# Altium PCB deepshark_pcb.PcbDoc (part 1 of 2)
Units mm, origin at the board's own origin, x right, y up, seen from the top; angles counter-clockwise.
Board outline 200 x 80 mm, 2 copper layers (Top Layer, Bottom Layer); 211 components, 120 nets, 671 pads, 118 vias.
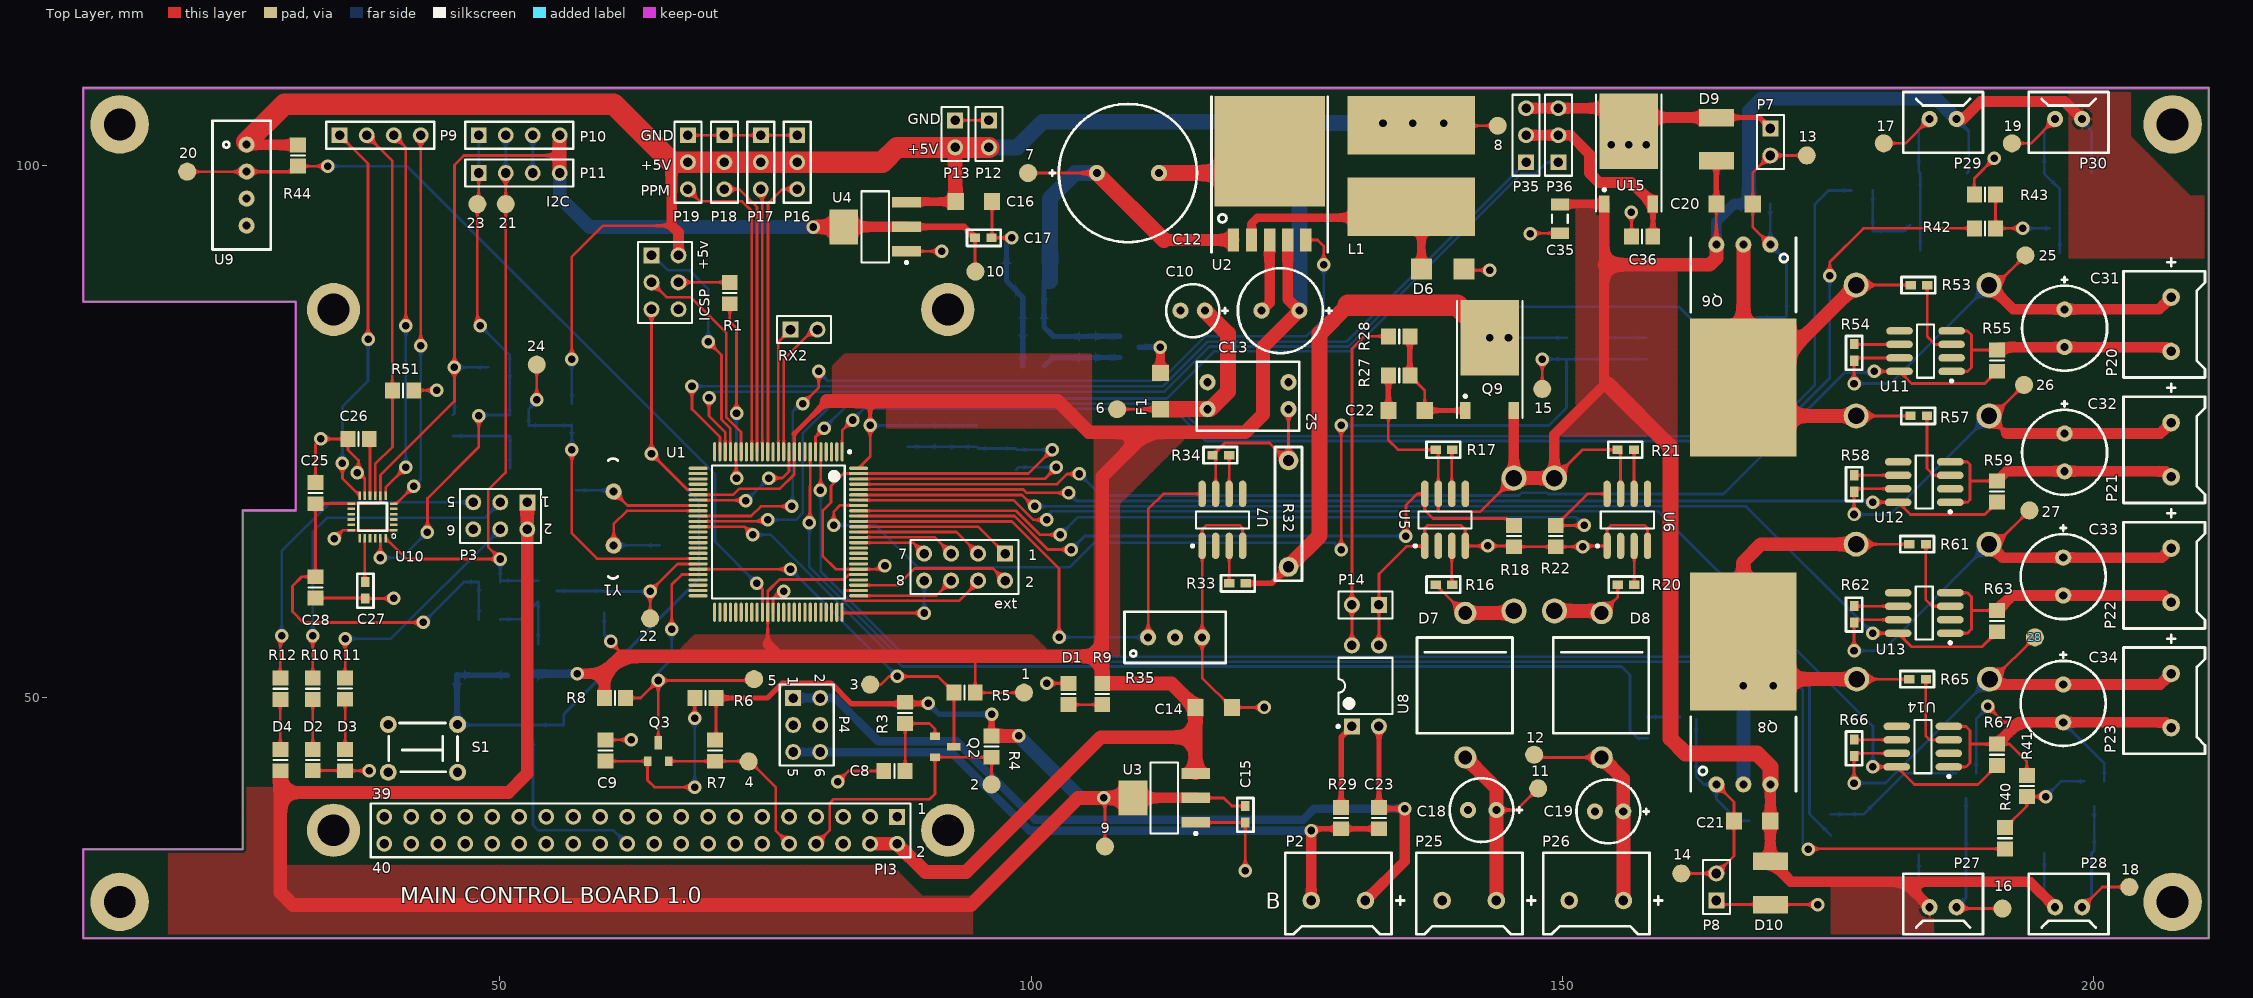
[diagram p0: Top Layer view]
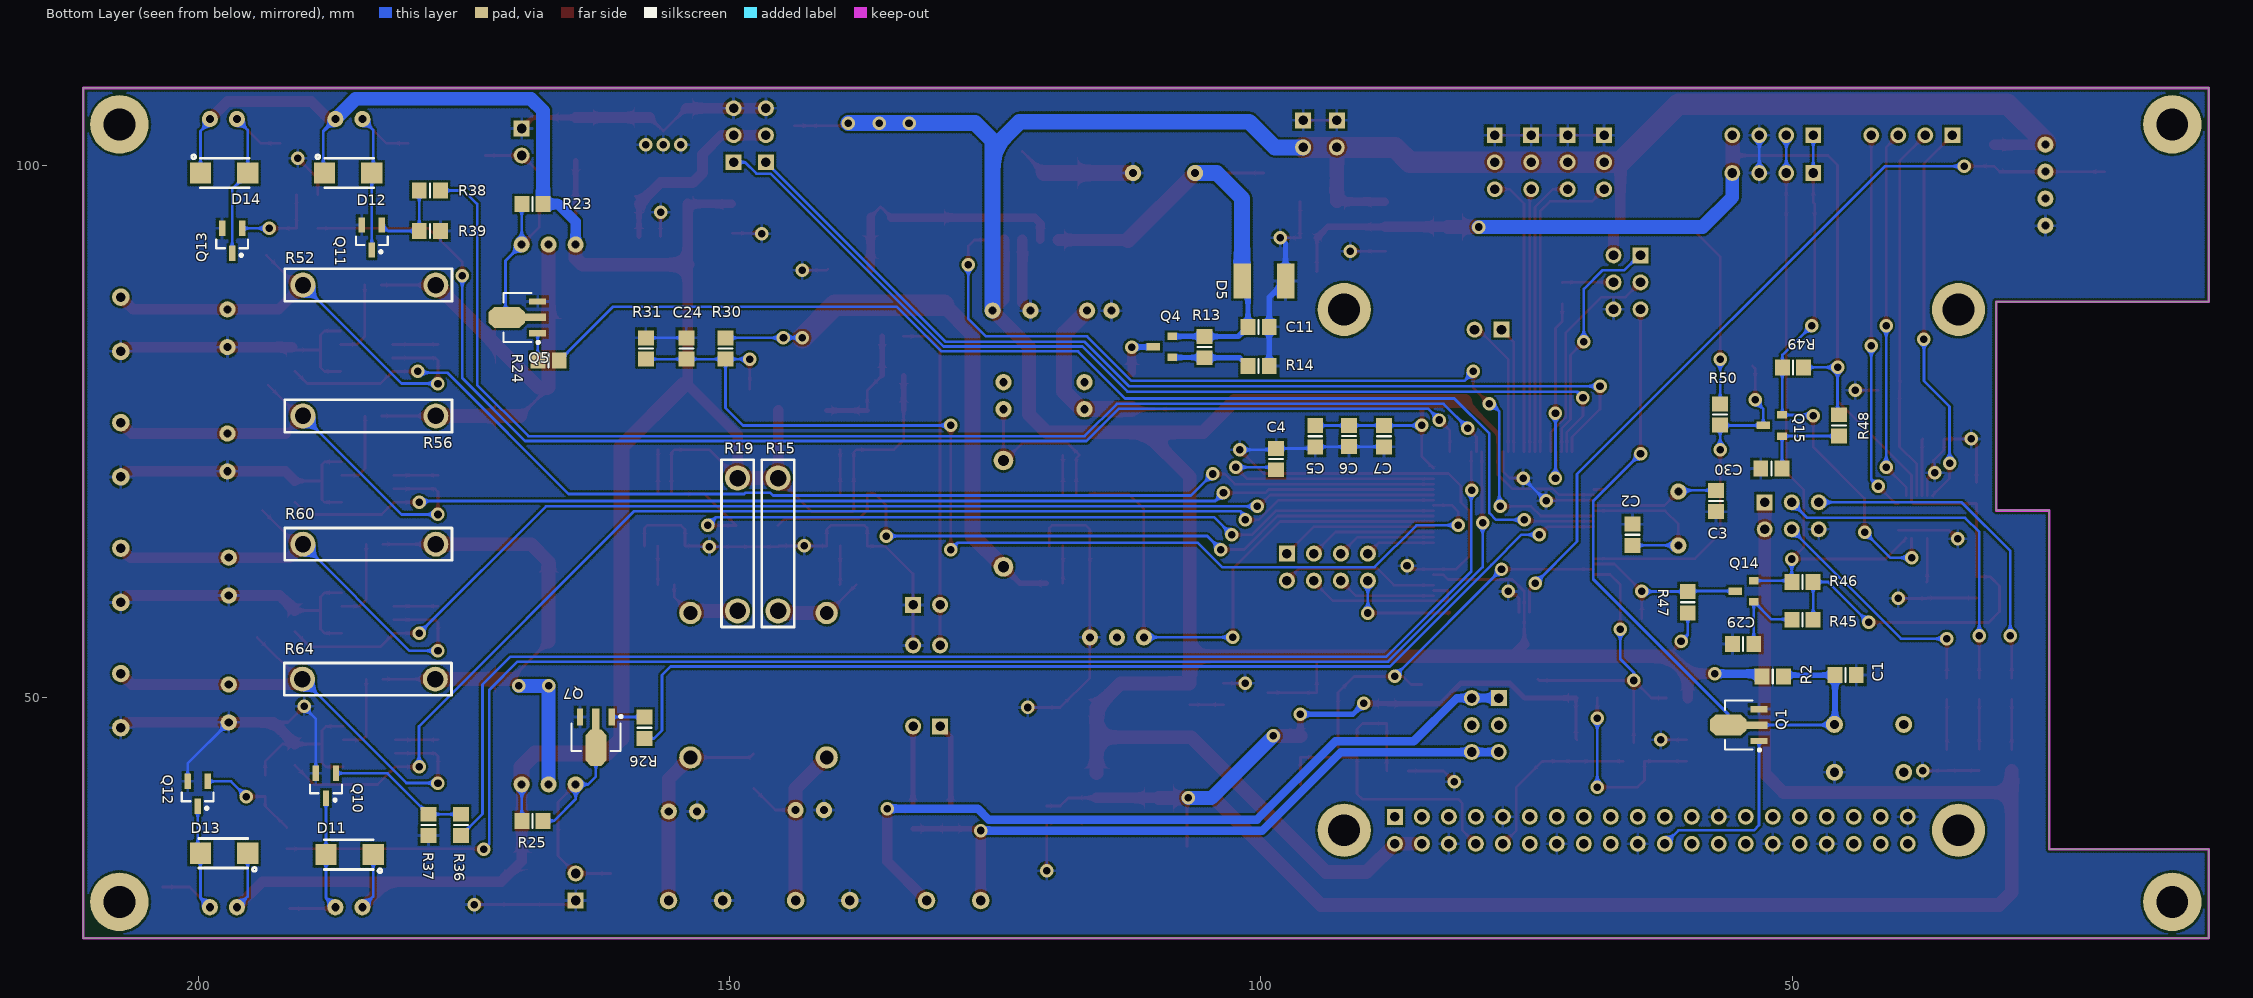
[diagram p1: Bottom Layer view, seen from below]

## Layer stack, top to bottom
Top Solder: solder mask 0.0102, Solder Resist, Dk 3.5
Top Layer: signal copper 0.0356
Dielectric 1: dielectric 0.32, FR-4, Dk 4.8
Bottom Layer: signal copper 0.0356
Bottom Solder: solder mask 0.0102, Solder Resist, Dk 3.5

## Board outline
10.795,27.315 10.795,35.687 25.795,35.687 25.795,67.56 30.795,67.56 30.795,87.195 10.795,87.195 10.795,107.315 210.795,107.315 210.795,27.315

## Design rules (kind name [scope] priority, off if disabled: settings)
Clearance [All] p1: gap=0.2
PolygonConnect [All] p1: connectstyle=Relief reliefconductorwidth=0.254 reliefentries=4 polygonreliefangle="90 Angle" airgapwidth=0.254
RoutingVias [All] p1: holewidth=0.711 width=1.27 viastyle="Through Hole" minholewidth=0.711 minwidth=1.27 maxholewidth=0.711 maxwidth=1.27
SolderMaskExpansion [All] p1: expansion=0.102
Width [All] p1: maxlimit=5 minlimit=0.254 preferedwidth=0.254
30 further rules are at their usual default settings.

## Classes and differential pairs
component class deepshark_servo: C35 C36 P35 P36 U15
component class deepshark_sensor: 20 21 22 23 24 C25 C26 C27 C28 C29 C30 Q14 Q15 R44 R45 R46 R47 R48 R49 R50 R51 U9 U10
component class deepshark_sch: 1 2 3 4 5 C1 C2 C3 C4 C5 C6 C7 C8 C9 D1 ICSP Q1 Q2 Q3 R1 R2 R3 R4 R5 R6 R7 R8 R9 S1 U1 Y1
component class deepshark_pwm_power: 16 17 18 19 D11 D12 D13 D14 Q10 Q11 Q12 Q13 R36 R37 R38 R39 R40 R41 R42 R43
component class deepshark_power_switch: 11 12 13 14 15 C18 C19 C20 C21 C22 C23 C24 D7 D8 D9 D10 Q5 Q6 Q7 Q8 Q9 R15 R16 R17 R18 R19 R20 R21 R22 R23 R24 R25 R26 R27 R28 R29 R30 R31 R32 R33 R34 R35 U5 U6 U7 U8
component class deepshark_power_sch: 6 7 8 9 10 C10 C11 C12 C13 C14 C15 C16 C17 D5 D6 F1 L1 Q4 R13 R14 S2 U2 U3 U4
component class deepshark_ecs: 25 26 27 28 C31 C32 C33 C34 R52 R53 R54 R55 R56 R57 R58 R59 R60 R61 R62 R63 R64 R65 R66 R67 U11 U12 U13 U14
component class deepshark_connector: D2 D3 D4 ext P2 P3 P4 P7 P8 P9 P10 P11 P12 P13 P14 P16 P17 P18 P19 P20 P21 P22 P23 P25 P26 P27 P28 P29 P30 PI3 R10 R11 R12 RX2

## Components (designator, comment, footprint, x,y, rotation, side; value= is the part's Value field where it differs from the comment)
1 "TP1" TestPoint#1 99.314,50.419 r0 top
2 "TP" TestPoint#1 96.266,41.783 r0 top
3 "TP" TestPoint#1 84.836,51.181 r0 top
4 "TP" TestPoint#1 73.406,43.942 r0 top
5 "TP" TestPoint#1 73.914,51.689 r0 top
6 "TP" TestPoint#1 108.077,77.089 r0 top
7 "TP" TestPoint#1 99.695,99.314 r0 top
8 "TP" TestPoint#1 143.891,103.759 r0 top
9 "TP" TestPoint#1 106.934,35.941 r0 top
10 "TP" TestPoint#1 94.742,90.043 r90 top
11 "TP" TestPoint#1 147.701,41.402 r0 top
12 "TP" TestPoint#1 147.32,44.577 r90 top
13 "TP" TestPoint#1 172.974,100.965 r90 top
14 "TP" TestPoint#1 161.163,33.401 r90 top
15 "TP" TestPoint#1 148.082,78.994 r90 top
16 "TP" TestPoint#1 191.389,30.099 r90 top
17 "TP" TestPoint#1 180.213,102.108 r90 top
18 "TP" TestPoint#1 203.327,32.131 r90 top
19 "TP" TestPoint#1 192.278,102.108 r90 top
20 "TP" TestPoint#1 20.574,99.441 r90 top
21 "TP" TestPoint#1 50.546,96.393 r90 top
22 "TP" TestPoint#1 64.135,57.404 r90 top
23 "TP" TestPoint#1 47.879,96.393 r90 top
24 "TP" TestPoint#1 53.467,81.28 r90 top
25 "TP" TestPoint#1 193.548,91.567 r90 top
26 "TP" TestPoint#1 193.421,79.375 r90 top
27 "TP" TestPoint#1 193.929,67.564 r90 top
28 "TP" TestPoint#2 194.437,65.626 r90 top
C1 "Cap" 6-0805_M 44.958,52.07 r0 bottom
C2 "Cap" 6-0805_M 65.024,65.278 r90 bottom
C3 "Cap" 6-0805_M 57.15,68.453 r270 bottom
C4 "Cap" 6-0805_M 98.552,72.39 r270 bottom
C5 "Cap" 6-0805_M 94.869,74.549 r90 bottom
C6 "Cap" 6-0805_M 91.694,74.565 r90 bottom
C7 "Cap" 6-0805_M 88.392,74.549 r90 bottom
C8 "Cap" 6-0805_M 87.122,43.053 r180 top
C9 "Cap" 6-0805_M 59.944,44.974 r90 top
C10 "Cap Pol2" 22uf-25V 115.189,86.36 r180 top
C11 "Cap" 6-0805_M 100.203,84.836 r0 bottom
C12 "Cap Pol2" 680uf-50v 109.093,99.314 r0 top
C13 "Cap Pol2" 220uf-50v 123.444,86.36 r180 top
C14 "Cap Pol2" 1206 115.402,49.052 r0 top
C15 "Cap Pol2" my0603 120.142,39.751 r270 top
C16 "Cap Pol2" 1206 92.837,96.647 r0 top
C17 "Cap Pol2" my0603 94.711,93.218 r0 top
C18 "Cap Pol2" 100uf-25v 142.367,39.37 r180 top
C19 "Cap Pol2" 100uf-25v 154.305,39.243 r180 top
C20 "Cap Pol2" 1206 164.415,96.423 r0 top
C21 "Cap Pol2" 1206 169.586,38.324 r180 top
C22 "Cap" 1206 133.554,76.992 r0 top
C23 "Cap" 6-0805_M 132.715,38.608 r90 top
C24 "Cap" 6-0805_M 154.051,82.804 r270 bottom
C25 "Cap" 6-0805_M 32.639,69.199 r270 top
C26 "Cap" 6-0805_M 36.703,74.295 r0 top
C27 "Cap" my0603 37.338,60.833 r270 top
C28 "Cap" 6-0805_M 32.639,60.325 r270 top
C29 "Cap" 6-0805_M 54.61,54.991 r0 bottom
C30 "Cap" 6-0805_M 51.943,71.501 r0 bottom
C31 "Cap Pol2" 220uf-50v 197.231,84.709 r270 top
C32 "Cap Pol2" 220uf-50v 197.231,73.025 r270 top
C33 "Cap Pol2" 220uf-50v 197.104,61.341 r270 top
C34 "Cap Pol2" 220uf-50v 197.104,49.403 r270 top
C35 "Cap Semi" C1206 149.733,94.996 r90 top
C36 "Cap Semi" 6-0805_M 157.48,93.345 r0 top
D1 "POWER" 6-0805_M 103.505,50.292 r90 top
D2 "LED0" 6-0805_M 32.385,44.085 r270 top
D3 "LED0" 6-0805_M 35.433,44.069 r270 top
D4 "LED0" 6-0805_M 29.337,44.069 r90 top
D5 "SMAJ18A/20V" SMBJ6.5A 97.593,89.114 r0 bottom
D6 "1N5824" 1N5824 140.716,90.297 r180 top
D7 "10A" 10A-Rectifier 145.288,46.609 r180 top
D8 "10A" 10A-Rectifier 158.115,46.609 r180 top
D9 "SMAJ18A/20V" SMBJ6.5A 164.505,104.607 r270 top
D10 "SMAJ18A/20V" SMBJ6.5A 169.505,30.41 r90 top
D11 "M7 1N4007 1A/1000V" M7-1n4007 183.515,33.782 r0 bottom
D12 "M7 1N4007 1A/1000V" M7-1n4007 188.087,100.711 r180 bottom
D13 "M7 1N4007 1A/1000V" M7-1n4007 195.326,33.909 r0 bottom
D14 "M7 1N4007 1A/1000V" M7-1n4007 199.771,100.711 r180 bottom
ext "*" HDR2X4 97.536,63.5 r180 top locked
F1 "Fuse 3A" 1206 112.111,77.039 r90 top
ICSP "Header 3X2" HDR2X3 64.262,91.567 r270 top
L1 "Inductor" "12x12 L" 128.973,106.409 r90 top
P2 "Header 2" ConnectorBlue 126.345,30.861 r0 top
P3 "Header 3X2" HDR2X3 52.578,68.326 r180 top locked
P4 "Header 3X2" HDR2X3 77.597,49.911 r270 top locked
P7 "Header 2" HDR1X2 169.545,103.505 r270 top
P8 "Header 2" HDR1X2 164.465,30.861 r90 top
P9 "Header 4" HDR1X4 34.925,102.87 r0 top
P10 "Header 4" HDR1X4 48.006,102.87 r0 top
P11 "Header 4" HDR1X4 48.006,99.314 r0 top
P12 "Header 2" HDR1X2 96.012,104.267 r270 top
P13 "Header 2" HDR1X2 92.837,104.267 r270 top
P14 "Header 2" HDR1X2 132.715,58.674 r180 top
P16 "Header 3" HDR1X3 77.978,102.87 r270 top
P17 "Header 3" HDR1X3 74.549,102.87 r270 top
P18 "Header 3" HDR1X3 71.12,102.87 r270 top
P19 "Header 3" HDR1X3 67.691,102.87 r270 top
P20 "Header 2" ConnectorBlue 207.264,82.53 r90 top
P21 "Header 2" ConnectorBlue 207.264,70.719 r90 top
P22 "Header 2" ConnectorBlue 207.264,58.908 r90 top
P23 "Header 2" ConnectorBlue 207.264,47.117 r90 top
P25 "Header 2" ConnectorBlue 138.664,30.861 r0 top
P26 "Header 2" ConnectorBlue 150.622,30.861 r0 top
P27 "Header 2" headerX2 187.071,30.226 r180 top
P28 "Header 2" headerX2 198.882,30.226 r180 top
P29 "Header 2" headerX2 184.531,104.394 r0 top
P30 "Header 2" headerX2 196.342,104.394 r0 top
P35 "Header 3" HDR1X3 146.558,100.33 r90 top
P36 "Header 3" HDR1X3 149.606,100.33 r90 top
PI3 "Header 20X2" HDR2X20 87.376,38.735 r180 top locked
Q1 "(SS8050)NPN" SOT89M 55.007,47.371 r0 bottom
Q2 "2N7002" 2N7002 -24.903,37.397 r270 top
Q3 "2N7002" 2N7002 72.807,-71.88 r0 top
Q4 "A19T/4.2A/30V" A19T 110.106,82.953 r90 bottom
Q5 "(SS8050)NPN" SOT89M 169.942,85.725 r0 bottom
Q6 "30A/IRF9540N" my-TO-220AB 164.465,92.583 r0 top
Q7 "(SS8050)NPN" SOT89M 162.56,46.228 r270 bottom
Q8 "30A/IRF9540N" my-TO-220AB 169.545,41.783 r180 top
Q9 "PMOS-2 /6A/to-252/IRFR5305" TO-252AA 143.129,80.395 r0 top
Q10 "SI2302/2.5A/20V" SOT23_M 187.96,41.656 r270 bottom
Q11 "SI2302/2.5A/20V" SOT23_M 183.642,93.25 r270 bottom
Q12 "SI2302/2.5A/20V" SOT23_M 200.025,40.894 r270 bottom
Q13 "SI2302/2.5A/20V" SOT23_M 196.784,92.932 r270 bottom
Q14 "2N7002" 2N7002 -62.241,67.886 r90 bottom
Q15 "2N7002" 2N7002 -64.895,83.475 r90 bottom
R1 "Res1" 6-0805_M 71.628,88.011 r270 top
R2 "Res1" 6-0805_M 51.816,51.943 r0 bottom
R3 "Res1" 6-0805_M 88.138,48.514 r90 top
R4 "Res1" 6-0805_M 96.266,45.339 r270 top
R5 "Res1" 6-0805_M 93.726,50.419 r0 top
R6 "Res1" 6-0805_M 69.342,49.911 r180 top
R7 "Res1" 6-0805_M 70.231,44.958 r90 top
R8 "Res1" 6-0805_M 60.833,49.911 r0 top
R9 "Res1" 6-0805_M 106.68,50.292 r270 top
R10 "Res2" 6-0805_M 32.385,50.784 r90 top
R11 "Res2" 6-0805_M 35.433,50.8 r90 top
R12 "Res2" 6-0805_M 29.337,50.784 r270 top
R13 "Res1" 6-0805_M 105.283,82.931 r270 bottom
R14 "Res1" 6-0805_M 100.203,81.153 r0 bottom
R15 "Res2" 5mo 145.415,58.112 r90 bottom
R16 "Res2" my0603 139.604,60.579 r180 top
R17 "Res2" my0603 139.604,73.279 r180 top
R18 "Res2" 6-0805_M 145.415,65.151 r90 top
R19 "Res2" 5mo 149.225,58.112 r90 bottom
R20 "Res2" my0603 156.749,60.579 r180 top
R21 "Res2" my0603 156.718,73.279 r180 top
R22 "Res2" 6-0805_M 149.352,65.151 r90 top
R23 "Res2" 6-0805_M 168.529,96.393 r0 bottom
R24 "Res2" 6-0805_M 167.005,81.661 r0 bottom
R25 "Res2" 6-0805_M 168.529,38.354 r180 bottom
R26 "Res2" 6-0805_M 157.988,47.117 r270 bottom
R27 "Res2" 6-0805_M 134.62,80.264 r0 top
R28 "Res2" 6-0805_M 134.62,83.947 r180 top
R29 "Res2" 6-0805_M 129.159,38.608 r270 top
R30 "Res2" 6-0805_M 150.368,82.804 r90 bottom
R31 "Res2" 6-0805_M 157.861,82.804 r270 bottom
R32 "Res2" 10mo 124.206,72.263 r270 top
R33 "Res2" my0603 118.618,60.706 r0 top
R34 "Res2" my0603 118.618,72.771 r180 top
R35 "adj-R 5K" adj-R 110.998,56.769 r0 top
R36 "Res2" 6-0805_M 175.26,37.973 r90 bottom
R37 "Res2" 6-0805_M 178.308,37.973 r270 bottom
R38 "Res2" 6-0805_M 178.181,97.663 r0 bottom
R39 "Res2" 6-0805_M 178.181,93.853 r180 bottom
R40 "Res2" 6-0805_M 191.643,36.719 r90 top
R41 "Res2" 6-0805_M 193.675,41.64 r90 top
R42 "Res2" 6-0805_M 189.738,94.107 r0 top
R43 "Res2" 6-0805_M 189.738,97.282 r180 top
R44 "Res2" 6-0805_M 30.988,100.965 r90 top
R45 "Res1" 6-0805_M 49.022,57.277 r0 bottom
R46 "Res1" 6-0805_M 49.022,60.833 r180 bottom
R47 "Res1" 6-0805_M 59.817,58.928 r270 bottom
R48 "Res1" 6-0805_M 45.593,75.565 r270 bottom
R49 "Res1" 6-0805_M 49.911,81.026 r180 bottom
R50 "Res1" 6-0805_M 56.769,76.597 r90 bottom
R51 "Res1" 6-0805_M 40.894,78.867 r180 top
R52 "Res2" 5mo 177.619,88.773 r0 bottom
R53 "Res2" my0603 184.308,88.773 r180 top
R54 "Res2" my0603 177.419,83.216 r270 top
R55 "Res2" 6-0805_M 190.881,81.661 r270 top
R56 "Res2" 5mo 177.619,76.454 r0 bottom
R57 "Res2" my0603 184.277,76.454 r180 top
R58 "Res2" my0603 177.419,70.866 r270 top
R59 "Res2" 6-0805_M 190.881,69.342 r270 top
R60 "Res2" 5mo 177.619,64.389 r0 bottom
R61 "Res2" my0603 184.181,64.389 r180 top
R62 "Res2" my0603 177.419,58.578 r270 top
R63 "Res2" 6-0805_M 190.881,57.15 r270 top
R64 "Res2" 5mo 177.673,51.689 r0 bottom
R65 "Res2" my0603 184.181,51.689 r180 top
R66 "Res2" my0603 177.419,46.005 r270 top
R67 "Res2" 6-0805_M 190.881,44.577 r270 top
RX2 "Header 2" HDR1X2 77.343,84.582 r0 top
S1 "SW-PB" switch4 46.271,43.108 r180 top
S2 "SW-PB" switch-2bit 124.206,77.089 r90 top
U1 "ATmega1280-16AU/2560" 100A_N 76.2,65.532 r270 top locked
U2 "LM2596S-5" LM2596 122.428,95.048 r270 top
U3 "AMS1117-3.3" SOT223_M 112.522,40.513 r180 top
U4 "AMS1117-3.3" SOT223_M 85.315,94.248 r180 top
U5 "max472" SO-8_M 138.938,66.675 r90 top
U6 "max472" SO-8_M 156.083,66.675 r90 top
U7 "max472" SO-8_M 117.983,66.675 r90 top
U8 "PC817" DIP-4 131.445,51.054 r90 top
U9 "dht11" DHT11 26.162,101.981 r270 top
U10 "MPU-6050" mpu6050 39.37,65.659 r180 top locked
U11 "max472" SO-8_M 184.15,82.55 r180 top
U12 "max472" SO-8_M 184.023,70.231 r180 top
U13 "max472" SO-8_M 184.023,57.912 r180 top
U14 "max472" SO-8_M 183.896,45.339 r180 top
U15 "78M05" TO-252AA 156.21,99.826 r0 top
Y1 "16M" Y 60.706,69.342 r270 top

## Footprints (in the part's own frame and the unit in brackets; to place one, negate y for a bottom-side part, rotate by r counter-clockwise, add the part's x,y. Pads: shape width x height; smd on the part's side, far side on the other; paste and mask are expansions set on the pad)
1N5824 [mm]
  rect 2x2 smd: A(0,0.01) K(4,0.01)
2N7002 [mm]
  rect 0.7x0.915 smd: 1(-8.914,115.837) 3(-6.926,115.835)
  rect 0.7x1.27 smd: 2(-7.91,117.6)
5mo [mm]
  round 2.35 hole 1.55: 1(0,0) 2(12.5,0)
  silkscreen extent -1.52,-1.52 14.22,1.52
6-0805_M [mm] "Chip Resistor, Body 2.0x1.2mm, IPC Low Density"
  rect 1.4x1.5 smd: 1(-1,0) 2(1,0)
  silkscreen extent 0,-0.65 0,0.65, body extent -1.07,-0.7 1.07,0.7, height 0.7
10A-Rectifier [mm]
  round 2.1 hole 1.3: 1(4.445,2.286) 2(4.445,-11.303)
  silkscreen extent 0,-9 9,0
10mo [mm]
  round 1.85 hole 1.05: 1(0,0) 2(10,0)
  silkscreen extent -1.27,-1.27 11.3,1.27
"12x12 L" [mm]
  rect 5.5x12 smd: 1(-10.27,-6.79) 2(-2.58,-6.79)
22uf-25V [mil]
  round 60 hole 30: 1(-45,0) 2(45,0)
  silkscreen extent -130,-98 98,98
100A_N [mm] "Thin QFP, 100-Leads, Body 14x14mm, Pitch 0.5mm, IPC Medium Density"
  oval 1.8x0.3 smd: 1(-7.55,6) 2(-7.55,5.5) 3(-7.55,5) 4(-7.55,4.5) 5(-7.55,4) 6(-7.55,3.5) 7(-7.55,3) 8(-7.55,2.5) 9(-7.55,2) 10(-7.55,1.5) 11(-7.55,1) 12(-7.55,0.5) 13(-7.55,0) 14(-7.55,-0.5) 15(-7.55,-1) 16(-7.55,-1.5) 17(-7.55,-2) 18(-7.55,-2.5) 19(-7.55,-3) 20(-7.55,-3.5) 21(-7.55,-4) 22(-7.55,-4.5) 23(-7.55,-5) 24(-7.55,-5.5) 25(-7.55,-6) 51(7.55,-6) 52(7.55,-5.5) 53(7.55,-5) 54(7.55,-4.5) 55(7.55,-4) 56(7.55,-3.5) 57(7.55,-3) 58(7.55,-2.5) 59(7.55,-2) 60(7.55,-1.5) 61(7.55,-1) 62(7.55,-0.5) 63(7.55,0) 64(7.55,0.5) 65(7.55,1) 66(7.55,1.5) 67(7.55,2) 68(7.55,2.5) 69(7.55,3) 70(7.55,3.5) 71(7.55,4) 72(7.55,4.5) 73(7.55,5) 74(7.55,5.5) 75(7.55,6)
  oval 0.3x1.8 smd: 26(-6,-7.55) 27(-5.5,-7.55) 28(-5,-7.55) 29(-4.5,-7.55) 30(-4,-7.55) 31(-3.5,-7.55) 32(-3,-7.55) 33(-2.5,-7.55) 34(-2,-7.55) 35(-1.5,-7.55) 36(-1,-7.55) 37(-0.5,-7.55) 38(0,-7.55) 39(0.5,-7.55) 40(1,-7.55) 41(1.5,-7.55) 42(2,-7.55) 43(2.5,-7.55) 44(3,-7.55) 45(3.5,-7.55) 46(4,-7.55) 47(4.5,-7.55) 48(5,-7.55) 49(5.5,-7.55) 50(6,-7.55) 76(6,7.55) 77(5.5,7.55) 78(5,7.55) 79(4.5,7.55) 80(4,7.55) 81(3.5,7.55) 82(3,7.55) 83(2.5,7.55) 84(2,7.55) 85(1.5,7.55) 86(1,7.55) 87(0.5,7.55) 88(0,7.55) 89(-0.5,7.55) 90(-1,7.55) 91(-1.5,7.55) 92(-2,7.55) 93(-2.5,7.55) 94(-3,7.55) 95(-3.5,7.55) 96(-4,7.55) 97(-4.5,7.55) 98(-5,7.55) 99(-5.5,7.55) 100(-6,7.55)
  silkscreen extent -7.67,-6.25 6.25,6.83, body extent -7,-7 7,7, height 1.2
100uf-25v [mil]
  round 60 hole 30: 1(-55,0) 2(50,0)
  silkscreen extent -150,-118 118,118
220uf-50v [mil]
  round 60 hole 30: 1(-70,0) 2(70,0)
  silkscreen extent -190,-157 157,157
680uf-50v [mil]
  round 60 hole 30: 1(-115,0) 2(115,0)
  silkscreen extent -290,-256 256,256
1206 [mm]
  rect 1.52x1.6 smd: 1(0.05,-0.03) 2(3.47,-0.03)
A19T [mm]
  rect 0.7x0.915 smd: 1(-0.994,-1.773) 3(0.994,-1.775)
  rect 0.7x1.27 smd: 2(0.01,-0.01)
adj-R [mil]
  round 60 hole 30: 1(0,-45) 2(100,-45) 3(200,-45)
  silkscreen extent -88,-140 288,50
C1206 [mm] "Chip Capacitor, Body 3.2x1.6mm, IPC High Density"
  rect 1.1x1.7 smd: 1(-1.35,0) 2(1.35,0)
  silkscreen extent -0.4,-0.75 0.4,0.75, body extent -1.7,-0.9 1.7,0.9, height 1.3
ConnectorBlue [mm]
  round 1.65 hole 0.9: 1(0,0) 2(5.1,0)
  silkscreen extent -2.45,-3.17 8.76,4.48
DHT11 [mil]
  round 60 hole 30: 1(0,0) 2(100,0) 3(200,0) 4(300,0)
  silkscreen extent -88,-127 388,90
DIP-4 [mm] "DIP; 4 Leads; Row Spacing 7.62 mm; Pitch 2.54 mm"
  rect 1.5x1.5 hole 0.9: 1(-3.81,1.27)
  round 1.5 hole 0.9: 2(-3.81,-1.27) 3(3.81,-1.27) 4(3.81,1.27)
  silkscreen extent -3.93,-2.55 2.65,2.69, body extent -3.15,-2.5 3.15,2.5, height 5.6
HDR1X2 [mm] "Connector; Header; 2 Position"
  rect 1.5x1.5 hole 0.9: 1(0,0)
  round 1.5 hole 0.9: 2(2.54,0)
  silkscreen extent -1.27,-1.27 3.81,1.27
HDR1X3 [mm] "Connector; Header; 3 Position"
  rect 1.5x1.5 hole 0.9: 1(0,0)
  round 1.5 hole 0.9: 2(2.54,0) 3(5.08,0)
  silkscreen extent -1.27,-1.27 6.35,1.27
HDR1X4 [mm] "Connector; Header; 4 Position"
  rect 1.5x1.5 hole 0.9: 1(0,0)
  round 1.5 hole 0.9: 2(2.54,0) 3(5.08,0) 4(7.62,0)
  silkscreen extent -1.27,-1.27 8.89,1.27
HDR2X3 [mm] "Connector; Header; 3x2 Position"
  rect 1.5x1.5 hole 0.9: 1(0,0)
  round 1.5 hole 0.9: 2(0,2.54) 3(2.54,0) 4(2.54,2.54) 5(5.08,0) 6(5.08,2.54)
  silkscreen extent -1.27,-1.27 6.35,3.81
HDR2X4 [mm] "Connector; Header; 4x2 Position"
  rect 1.5x1.5 hole 0.9: 1(0,0)
  round 1.5 hole 0.9: 2(0,2.54) 3(2.54,0) 4(2.54,2.54) 5(5.08,0) 6(5.08,2.54) 7(7.62,0) 8(7.62,2.54)
  silkscreen extent -1.27,-1.27 8.89,3.81
HDR2X20 [mm] "Connector; Header; 20x2 Position"
  rect 1.5x1.5 hole 0.9: 1(0,0)
  round 1.5 hole 0.9: 2(0,2.54) 3(2.54,0) 4(2.54,2.54) 5(5.08,0) 6(5.08,2.54) 7(7.62,0) 8(7.62,2.54) 9(10.16,0) 10(10.16,2.54) 11(12.7,0) 12(12.7,2.54) 13(15.24,0) 14(15.24,2.54) 15(17.78,0) 16(17.78,2.54) 17(20.32,0) 18(20.32,2.54) 19(22.86,0) 20(22.86,2.54) 21(25.4,0) 22(25.4,2.54) 23(27.94,0) 24(27.94,2.54) 25(30.48,0) 26(30.48,2.54) 27(33.02,0) 28(33.02,2.54) 29(35.56,0) 30(35.56,2.54) 31(38.1,0) 32(38.1,2.54) 33(40.64,0) 34(40.64,2.54) 35(43.18,0) 36(43.18,2.54) 37(45.72,0) 38(45.72,2.54) 39(48.26,0) 40(48.26,2.54)
  silkscreen extent -1.27,-1.27 49.53,3.81
headerX2 [mil]
  round 60 hole 30: 1(0,0) 2(100,0)
  silkscreen extent -98,-124 198,100
LM2596 [mm]
  rect 2.16x1.07 smd: 1(2.032,-3.4) 2(2.032,-1.7) 3(2.032,0) 3(2.032,0) 4(2.032,1.7) 5(2.032,3.4)
  rect 10.41x10.41 smd: 6(-6.298,0)
  silkscreen extent -11.43,-5.46 3.17,5.46
M7-1n4007 [mm]
  rect 2x2 smd: 1(4.445,-1.397) 2(0,-1.397)
  silkscreen extent -0.81,-2.79 4.6,0.31
mpu6050 [mm]
  rect 0.7x0.25 smd: 1(-0.65,-0.05) 2(-0.65,-0.55) 3(-0.65,-1.05) 4(-0.65,-1.55) 5(-0.65,-2.05) 6(-0.65,-2.55) 13(3.35,-2.55) 14(3.35,-2.05) 15(3.35,-1.55) 16(3.35,-1.05) 17(3.35,-0.55) 18(3.35,-0.05)
  rect 0.25x0.8 smd: 7(0.125,-3.3) 8(0.615,-3.3) 9(1.105,-3.3) 10(1.595,-3.3) 11(2.085,-3.3) 12(2.575,-3.3) 19(2.575,0.7) 20(2.085,0.7) 21(1.595,0.7) 22(1.105,0.7) 23(0.615,0.7) 24(0.125,0.7)
  silkscreen extent -0.83,-2.6 2.7,0.71
my0603 [mm]
  rect 0.965x0.8 smd: 1(0,0) 2(1.555,0)
  silkscreen extent -0.76,-0.76 2.41,0.76
my-TO-220AB [mil]
  round 60 hole 30: 1(200,0) 2(100,0) 3(0,0)
  rect 393.7x511.81 smd: 4(100,-530)
  silkscreen extent -95,-250 295,25
SMBJ6.5A [mm]
  rect 1.65x3.3 smd: A(0.07,-0.04) K(4.15,-0.04)
SO-8_M [mm] "SOIC, 8-Leads, Body 4.9x3.9mm, Pitch 1.27mm, IPC Low Density"
  oval 2.5x0.7 smd: 1(-2.45,1.905) 2(-2.45,0.635) 3(-2.45,-0.635) 4(-2.45,-1.905) 5(2.45,-1.905) 6(2.45,-0.635) 7(2.45,0.635) 8(2.45,1.905)
  silkscreen extent -2.57,-2.5 0.8,2.93, body extent -2,-2.5 2,2.5, height 1.75
SOT23_M [mm] "SOT23, 3-Leads, Body 2.9x1.3mm, Pitch 0.95mm, Lead Span 2.3mm - Reverse Pinning, IPC Low Density"
  rect 1.45x0.6 smd: 1(1.175,0) 2(-1.175,-0.95) 3(-1.175,0.95)
  silkscreen extent -0.1,-1.5 1.47,1.5, body extent -0.7,-1.5 0.7,1.5, height 1.1
SOT89M [mm] "SOT89, 3-Leads, Body 4.5x2.4 mm, Pitch 1.5mm, Lead Span 4.1mm, IPC Low Density"
  rect 1.6x0.6 smd: 1(-1.9,1.5) 3(-1.9,-1.5)
  rect 2x0.7 smd: 2(-1.7,0)
  oct 3.4x2 smd: 2(1,0)
  silkscreen extent -2.07,-2.3 1.3,2.47, body extent -1.3,-2.3 1.3,2.3, height 1.6
SOT223_M [mm] "SOT223, 4-Leads, Body 6.5x3.5mm, Pitch 2.3mm, Lead Span 7mm, IPC Low Density"
  rect 2.7x1 smd: 1(-2.95,2.3) 2(-2.95,0) 3(-2.95,-2.3)
  rect 2.7x3.3 smd: 4(2.95,0)
  silkscreen extent -3.08,-3.35 1.3,3.47, body extent -1.85,-3.35 1.85,3.35, height 1.7
switch4 [mm]
  round 1.6 hole 0.87: 1(0.254,0.182) 2(0.254,-4.318) 3(6.774,0.182) 4(6.774,-4.318)
  silkscreen extent 0.25,-4.44 6.73,0.13
switch-2bit [mil]
  round 60 hole 30: 1(0,300) 2(0,0) 3(100,300) 4(100,0)
  silkscreen extent -80,-40 176,340
TestPoint#1 [mm]
  round 1.7 smd: 1(0,0)
TestPoint#2 [mm]
  round 1.7 smd: 1(-10,0)
TO-252AA [mm] "D-PAK/TO-252-AA; 3 Leads (1 Cropped); Body 10.4 (inc. leads) x 6.7 mm (LxW max)"
  rect 1x1.6 smd: 1(-2.285,-3.425) 3(2.285,-3.425)
  rect 5.5x7.1 smd: 4(0,3.425)
  silkscreen extent -3.08,-4.12 3.08,6.87
Y [mil]
  round 60 hole 30: 1(0,0) 2(200,0)
  silkscreen extent -122,-20 322,15

## Part data
1: library part TP
C1 C2 C3 C4 C5 C6 C7 C8 C9 C11 C22 C23 C24 C25 C26 C27 C28 C29 C30: "Capacitor"
C10 C12 C13 C14 C15 C16 C17 C18 C19 C20 C21 C31 C32 C33 C34: "Polarized Capacitor (Axial)"
C35 C36: "Capacitor (Semiconductor SIM Model)"
D1: library part LED0, "Typical INFRARED GaAs LED"
D2 D3 D4: "Typical INFRARED GaAs LED"
D5 D6 D9 D10: library part DW
D7 D8 D11 D12 D13 D14: library part Diode, "Default Diode"
ext: library part "Header 4X2", "Header, 4-Pin, Dual row"
F1: library part "Fuse 1", "Fuse"
ICSP P3 P4: "Header, 3-Pin, Dual row"
P2 P7 P8 P12 P13 P14 P20 P21 P22 P23 P25 P26 P27 P28 P29 P30 RX2: "Header, 2-Pin"
P9 P10 P11: "Header, 4-Pin"
P16 P17 P18 P19 P35 P36: "Header, 3-Pin"
PI3: "Header, 20-Pin, Dual row"
Q1 Q5 Q7: library part NPN, "NPN Bipolar Transistor"
Q2 Q3 Q10 Q11 Q12 Q13 Q14 Q15: library part NMOS-2, "N-Channel Power MOSFET"
Q4 Q6 Q8 Q9: library part PMOS-2, "P-Channel Power MOSFET"
R1 R2 R3 R4 R5 R6 R7 R8 R9 R10 R11 R12 R13 R14 R15 R16 R17 R18 R19 R20 R21 R22 R23 R24 R25 R26 R27 R28 R29 R30 R31 R32 R33 R34 R36 R37 R38 R39 R40 R41 R42 R43 R44 R45 R46 R47 R48 R49 R50 R51 R52 R53 R54 R55 R56 R57 R58 R59 R60 R61 R62 R63 R64 R65 R66 R67: "Resistor"
R35: library part adj-R
S1 S2: "Switch"
U1: library part ATmega1280-16AU, "8-bit AVR Microcontroller, 2.7-5.5V, 8MHz, 128KB Flash, 4KB EEPROM, 8KB SRAM, 86 GPIO pins, 100-pin TQFP, Industrial Grade (-40癈 to 85癈), Pb-Free"
U8: library part Optoisolator1, "4-Pin Phototransistor Optocoupler"
U9: library part dht411
Y1: library part XTAL, "Crystal Oscillator"

## Free pads (board coordinates)
  round 5.5 hole 3: 0(14.224,103.886) 1(14.224,30.734) 2(207.391,30.734) 3(207.391,103.886)
  round 5 hole 3: 4(92.146,37.465) 5(34.346,37.465) 6(92.146,86.465) 7(34.346,86.465)

## Via types
v1: diameter 1.27, hole 0.711, Top Layer to Bottom Layer, 118 vias

## Nets (pads, with @x,y where several pads share a name; then routed paths per layer and width w, separated by ;. In a path a pad name is that pad's centre, name@x,y a point inside that pad or via, vN(x,y) a via of type N, cw(c..) or ccw(c..) an arc to the next point about the centre after c; other vN are vias at no path point)
+5V: 1.1 8.1 C5.2 C6.2 C7.2 C13.1 C14.1 C16.1 ICSP.2 L1.2 P12.2 P13.2 P16.2 P17.2 P18.2 P19.2 PI3.2 PI3.4 R2.2 R5.2 R8.1 R9.1 R44.2 R47.2 R50.2 U1.10 U1.31 U1.61 U1.80 U1.100 U2.4 U3.3 U4.3 U9.1 | length 449
  Top Layer w0.254: U9.1@26.162,102.235 U9.1@26.162,101.981 U9.1@26.178,101.965 ; v1(56.769,81.788) 56.769,91.44 59.69,94.361 66.167,94.361 ; v1(57.277,52.197) v1@57.293,52.213 ; v1(60.452,55.245) 60.452,55.118 61.468,54.102 61.468,53.848 ; U1.31@68.65,69.032 71.953,69.032 72.517,69.596 76.327,69.596 77.7,70.969 U1.10@77.7,73.082 77.7,74.779 ; 75.2,54.975 U1.61@75.2,57.982 75.2,59.96 76.31,61.07 82.363,61.07 82.802,61.509 83.727,61.509 U1.80@83.75,61.532 ; U1.100@83.75,71.532 84.836,72.618 v1(84.836,75.565) 84.836,77.851 ; U4.3@88.265,96.548 U4.3@88.334,96.617 ; C16.1@92.837,96.667 C16.1@92.887,96.617 ; 94.742,53.848 94.726,53.832 R5.2@94.726,50.419 1.1@99.314,50.419 ; U3.3@115.452,42.833 U3.3@115.472,42.813 ; L1.2@138.811,103.759 8.1@143.891,103.759
  Top Layer w0.5: 77.7,74.779 80.772,77.851
  Top Layer w0.8: U4.3@88.334,96.617 C16.1@92.887,96.617
  Top Layer w1: U9.1@26.178,101.965 R44.2@30.988,101.965 ; v1@57.293,52.213 59.833,52.213 R8.1@59.833,49.911 ; 66.167,100.33 66.167,94.361 66.802,93.726 ICSP.2@66.802,91.567 ; 75.2,54.975 76.327,53.848 ; U2.4@124.128,93.016 124.128,87.454 C13.1@125.222,86.36
  Top Layer w1.3: 59.833,52.213 61.468,53.848 76.327,53.848 94.742,53.848 106.68,53.848 ; 80.772,77.851 84.836,77.851 102.489,77.851 105.41,74.93 110.871,74.93 ; PI3.4@84.836,36.195 PI3.2@87.376,36.195 90.043,33.528 93.853,33.528 106.553,46.228 115.452,46.228 ; C16.1@92.837,96.667 P13.2@92.837,101.727 ; U3.3@115.452,42.833 115.452,46.228 ; C13.1@125.222,86.36 121.793,82.931 121.793,76.581 120.142,74.93 110.871,74.93 ; 106.68,53.848 R9.1@106.68,51.292 113.182,51.292 C14.1@115.452,49.022 115.452,46.228 ; 106.68,53.848 106.68,70.739 110.871,74.93
  Top Layer w2: U9.1@26.162,102.235 29.718,105.791 60.706,105.791 66.167,100.33 P19.2@67.691,100.33 P18.2@71.12,100.33 P17.2@74.549,100.33 P16.2@77.978,100.33 85.979,100.33 87.376,101.727 P13.2@92.837,101.727 P12.2@96.012,101.727
  Bottom Layer w0.254: R2.2@52.816,51.943 R2.2@53.07,52.197 ; R50.2@56.769,77.597 v1(56.769,81.788) ; R47.2@59.817,57.928 59.817,55.88 v1(60.452,55.245) ; v1(84.836,75.565) 84.852,75.549 C7.2@88.392,75.549 88.408,75.565 C6.2@91.694,75.565 91.71,75.549 C5.2@94.869,75.549
  Bottom Layer w0.8: R2.2@53.07,52.197 v1(57.277,52.197)
  Bottom Layer w1.5: P12.2@96.012,101.727 98.679,101.727 101.092,104.14 122.682,104.14 125.222,101.6 ; C13.1@125.222,86.36 125.222,101.6 ; v1(138.811,104.013) v1(135.89,104.013) v1(133.096,104.013) 126.873,104.013 125.222,102.362 125.222,101.6
BAT1: 11.1 C18.1 D7.1 P25.2 | length 19.5
  Top Layer w0.254: C18.1@143.764,39.37 145.669,39.37 11.1@147.701,41.402
  Top Layer w1.3: D7.1@140.843,44.323 143.764,41.402 C18.1@143.764,39.37 P25.2@143.764,30.861
BAT2: 12.1 C19.1 D8.1 P26.2 | length 20.3
  Top Layer w0.254: 12.1@147.764,44.64 148.082,44.323 D8.1@153.67,44.323 ; C19.1@155.702,39.243 C19.1@155.722,39.223
  Top Layer w1.3: D8.1@153.67,44.323 155.702,42.291 C19.1@155.702,39.243 ; P26.2@155.722,30.861 C19.1@155.722,39.223
GND: C1.1 C2.2 C3.2 C4.1 C5.1 C6.1 C7.1 C8.2 C9.2 C10.2 C11.1 C12.2 C13.2 C14.2 C15.2 C16.2 C17.2 C18.2 C19.2 C24.1 C25.1 C26.1 C27.2 C28.2 C29.2 C30.2 C31.2 C32.2 C33.2 C34.2 C35.1 C36.1 D1.2 D2.2 D3.2 D5.A D6.A D9.A D10.A ICSP.6 P3.6 P7.1 P8.1 P10.3 P11.3 P12.1 P13.1 P14.1 P16.1 P17.1 P18.1 P19.1 P20.1 P21.1 P22.1 P23.1 P25.1 P26.1 P35.3 P36.3 PI3.6 PI3.9 PI3.14 PI3.20 PI3.25 PI3.30 PI3.34 PI3.39 Q1.3 Q5.3 Q7.3 Q10.2 Q11.2 Q12.2 Q13.2 R14.1 R18.1 R22.1 R31.1 R35.3 R37.2 R39.2 R41.2 R43.2 R51.1 R55.1 R59.1 R63.1 R67.1 S1.1 U1.11 U1.32 U1.62 U1.81 U1.99 U2.3 U2.6 U3.1 U4.1 U5.1 U5.4 U6.1 U6.4 U7.1 U7.4 U8.3 U9.4 U10.1 U10.11 U10.18 U11.1 U11.4 U12.1 U12.4 U13.1 U13.4 U14.1 U14.4 U15.4 | length 419.3
  Top Layer w0.254: D2.2@32.385,43.085 35.417,43.085 D3.2@35.433,43.069 37.703,43.069 v1(37.719,43.053) ; C28.2@32.639,59.325 37.291,59.325 C27.2@37.338,59.278 39.974,59.278 v1(40.005,59.309) ; C25.1@32.639,70.199 32.639,73.787 v1(33.147,74.295) C26.1@35.703,74.295 35.703,73.263 36.703,72.263 36.703,71.12 37.285,70.538 U10.11@37.285,68.959 ; v1(34.417,64.897) 35.229,65.709 U10.18@36.02,65.709 U10.1@40.02,65.709 ; R51.1@41.894,78.867 v1(44.069,78.867) ; C9.2@59.944,45.974 v1(62.357,45.974) ; P19.1@67.691,102.87 P18.1@71.12,102.87 P17.1@74.549,102.87 P16.1@77.978,102.87 ; U1.32@68.65,68.532 73.2,68.532 v1(73.152,68.484) ; v1(75.311,70.612) 76.581,70.612 77.2,71.231 U1.11@77.2,73.082 ; U1.62@75.7,57.982 75.7,59.317 76.327,59.944 v1(76.708,59.944) ; v1(81.788,42.037) 82.804,43.053 C8.2@86.122,43.053 ; v1(86.233,62.357) 85.908,62.032 U1.81@83.75,62.032 81.605,62.032 80.391,63.246 80.391,67.564 81.153,68.326 81.153,69.85 82.335,71.032 U1.99@83.75,71.032 99.734,71.032 v1(101.981,73.279) ; U4.1@88.265,91.948 v1(91.567,91.948) ; P13.1@92.837,104.267 P12.1@96.012,104.267 ; C16.2@96.307,96.617 96.307,93.259 C17.2@96.266,93.218 v1(98.171,93.218) ; v1(101.473,51.308) 101.489,51.292 D1.2@103.505,51.292 ; U3.1@115.472,38.213 115.489,38.196 C15.2@120.142,38.196 v1(120.142,33.655) ; R35.3@115.951,55.626 116.078,55.753 U7.1@116.078,64.225 116.078,65.786 116.459,66.167 119.634,66.167 119.888,65.913 U7.4@119.888,64.225 ; R35.3@116.078,55.626 116.078,51.816 C14.2@118.872,49.022 v1(121.92,49.022) ; U2.6@120.396,99.314 U2.6@122.428,101.346 ; U8.3@132.715,54.864 P14.1@132.715,58.674 132.715,61.595 135.309,64.189 136.997,64.189 U5.1@137.033,64.225 137.033,65.913 137.287,66.167 140.462,66.167 140.843,65.786 U5.4@140.843,64.225 v1(142.965,64.225) 145.341,64.225 R18.1@145.415,64.151 R22.1@149.352,64.151 v1(151.876,64.151) 151.95,64.225 U6.1@154.178,64.225 154.178,65.786 154.559,66.167 157.734,66.167 157.988,65.913 U6.4@157.988,64.225 ; D6.A@140.716,90.287 140.833,90.17 v1(143.129,90.17) ; v1(146.939,93.599) 146.986,93.646 C35.1@149.733,93.646 ; U15.4@154.051,105.41 U15.4@156.21,103.251 U15.4@157.496,104.537 ; v1(156.464,95.631) 156.48,95.615 C36.1@156.48,93.345 ; P8.1@164.465,30.861 164.846,30.48 D10.A@169.545,30.48 v1(173.99,30.48) ; U14.1@186.346,43.434 187.96,43.434 188.341,43.815 188.341,45.593 ; U14.4@186.346,47.244 187.96,47.244 188.341,46.863 188.341,45.593 ; U13.1@186.473,56.007 188.087,56.007 188.468,56.388 188.468,58.166 ; U13.4@186.473,59.817 188.087,59.817 188.468,59.436 188.468,58.166 ; U12.1@186.473,68.326 188.087,68.326 188.341,68.58 188.341,70.358 ; U12.4@186.473,72.136 188.087,72.136 188.341,71.882 188.341,70.358 ; U11.4@186.6,84.455 188.087,84.455 188.468,84.074 188.468,82.55 ; U11.1@186.616,80.661 U11.1@186.6,80.645 188.087,80.645 188.468,81.026 188.468,82.55 ; R43.2@188.738,97.282 188.738,98.822 v1(190.627,100.711) ; v1(189.992,49.149) 191.516,47.625 192.929,47.625 ; R63.1@190.881,58.15 188.484,58.15 188.468,58.166 ; R59.1@190.881,70.342 188.357,70.342 188.341,70.358 ; R55.1@191.151,82.931 R55.1@190.881,82.661 188.579,82.661 188.468,82.55 ; R41.2@193.675,42.64 193.675,43.942 192.04,45.577 R67.1@190.881,45.577 188.357,45.577 188.341,45.593
  Top Layer w0.5: D9.A@164.465,104.537 168.513,104.537 P7.1@169.545,103.505
  Top Layer w1: C13.2@121.666,86.36 122.428,87.122 U2.3@122.428,93.016 ; P35.3@146.558,105.41 P36.3@149.606,105.41 U15.4@154.051,105.41 ; U15.4@157.496,104.537 D9.A@164.465,104.537 ; R67.1@190.881,45.577 192.929,47.625 C34.2@197.104,47.625 206.756,47.625 P23.1@207.264,47.117 ; R63.1@190.881,58.15 192.294,59.563 C33.2@197.104,59.563 206.609,59.563 P22.1@207.264,58.908 ; R59.1@190.881,70.342 191.786,71.247 C32.2@197.231,71.247 206.736,71.247 P21.1@207.264,70.719 ; R55.1@191.151,82.931 C31.2@197.231,82.931 206.863,82.931 P20.1@207.264,82.53
  Top Layer w1.5: C12.2@112.014,99.314 U2.6@120.396,99.314
  Bottom Layer w0.254: P11.3@53.086,99.314 P10.3@53.086,102.87 ; PI3.25@56.891,38.74 PI3.25@56.896,38.735 ; v1(73.152,68.484) 73.183,68.484 v1(75.311,70.612) ; C7.1@88.392,73.549 88.408,73.565 C6.1@91.694,73.565 91.71,73.549 C5.1@94.869,73.549 95.028,73.39 C4.1@98.552,73.39 98.663,73.279 v1(101.981,73.279) ; C24.1@154.051,83.804 R31.1@157.861,83.804 ; Q10.2@188.91,42.831 188.91,47.94 189.992,49.022 v1(189.992,49.149) ; C34.2@197.104,47.625 200.975,43.754 Q12.2@200.975,42.069
  Bottom Layer w0.5: v1(98.171,93.218) 97.663,92.71 D5.A@97.663,89.154 99.203,87.614 C11.1@99.203,84.836 R14.1@99.203,81.153
  other v1: 36.576,71.12 154.559,101.981 156.21,101.981 157.861,101.981
MEGA_RX1: 3.1 Q2.2 R5.1 U1.45 | length 36.9
  Top Layer w0.254: U1.45@68.65,62.032 v1(77.343,62.032) ; 3.1@84.836,51.181 85.852,51.181 86.614,51.943 v1(87.376,51.943) 91.202,51.943 R5.1@92.726,50.419 92.726,45.336 Q2.2@92.697,45.307
  Bottom Layer w0.254: v1(77.343,62.032) 87.376,51.999 v1(87.376,51.943)
MEGA_TX1: 5.1 Q3.2 R8.2 U1.46 | length 31.1
  Top Layer w0.254: R8.2@61.833,49.911 63.246,49.911 v1(64.897,51.562) ; Q3.2@64.897,45.72 v1(64.897,51.562) ; v1(66.167,56.388) 66.167,60.579 67.12,61.532 U1.46@68.65,61.532 ; 5.1@73.914,51.689 73.787,51.562 v1(64.897,51.562)
  Bottom Layer w0.254: v1(64.897,51.562) 64.897,52.324 66.167,53.594 v1(66.167,56.388)
MISO: ICSP.1 U1.22 | length 22.8
  Top Layer w0.254: v1(69.596,83.439) 70.847,82.188 70.847,76.121 71.677,75.291 71.677,73.105 U1.22@71.7,73.082
  Bottom Layer w0.254: ICSP.1@64.262,91.567 64.389,91.567 65.786,90.17 67.818,90.17 69.596,88.392 v1(69.596,83.439)
MOSI: R1.2 U1.21 | length 19.2
  Top Layer w0.254: R1.2@71.628,87.011 71.628,85.344 72.263,84.709 v1(72.263,76.708) ; U1.21@72.2,73.082 72.223,73.059 72.223,70.652 v1(72.263,70.612)
  Bottom Layer w0.254: v1(72.263,70.612) v1(72.263,76.708)
Net2_1: 2.1 PI3.8 Q2.3 R4.2 | length 25.9
  Top Layer w0.254: PI3.8@79.756,36.195 81.026,37.465 81.026,40.005 81.407,40.386 90.424,40.386 90.932,40.894 Q2.3@90.932,44.323 90.948,44.339 R4.2@96.266,44.339 2.1@96.266,41.783
Net4_1: 4.1 PI3.10 Q3.3 R7.1 | length 16.9
  Top Layer w0.254: Q3.3@65.881,43.955 65.884,43.958 R7.1@70.231,43.958 73.39,43.958 4.1@73.406,43.942 73.533,43.942 75.946,41.529 75.946,37.465 PI3.10@77.216,36.195
Net6_1: 6.1 C10.1 F1.1 S2.1 | length 19.6
  Top Layer w0.254: 6.1@108.077,77.089 F1.1@112.141,77.089 ; S2.1@116.586,77.089 S2.1@116.84,77.089
  Top Layer w1.5: F1.1@112.141,77.089 S2.1@116.586,77.089 ; C10.1@116.332,86.36 118.491,84.201 118.491,78.74 S2.1@116.84,77.089
Net9_1: 9.1 C15.1 D4.1 P3.1 P3.2 R3.2 R4.1 R6.1 R7.2 U3.2 U3.4 | length 208.2
  Top Layer w0.254: R7.2@70.231,45.958 70.342,46.069 R6.1@70.342,49.911 ; R3.2@87.993,49.369 R3.2@88.138,49.514 R3.2@88.249,49.403 ; v1@98.79,46.339 v1(98.806,46.355) ; v1(106.807,40.513) 106.934,40.386 9.1@106.934,35.941 ; U3.2@115.472,40.513 118.11,40.513 118.872,39.751 C15.1@120.142,39.751
  Top Layer w0.5: R6.1@70.342,49.911 75.184,49.911 76.581,51.308 81.153,51.308 83.092,49.369 R3.2@87.993,49.369 ; R3.2@88.249,49.403 v1(90.297,49.403) ; R4.1@96.266,46.339 v1(96.266,48.387)
  Top Layer w1: U3.4@109.572,40.513 U3.2@115.472,40.513
  Top Layer w1.2: 29.337,41.021 50.8,41.021 52.578,42.799 P3.2@52.578,65.786 P3.1@52.578,68.326
  Top Layer w1.3: D4.1@29.337,43.069 29.337,41.021 29.337,31.623 30.514,30.446 94.327,30.446 104.394,40.513 v1(106.807,40.513) U3.4@109.572,40.513 ; R4.1@96.266,46.339 v1@98.79,46.339
  Bottom Layer w0.5: v1(90.297,49.403) 91.313,48.387 v1(96.266,48.387)
  Bottom Layer w1.3: v1(98.806,46.355) 104.648,40.513 v1(106.807,40.513)